# EAGLE board SparkFun_LiPo-Charger-Basic-MiniUSB-Panel-v10 (EAGLE 7.3.0), part 1 of 3
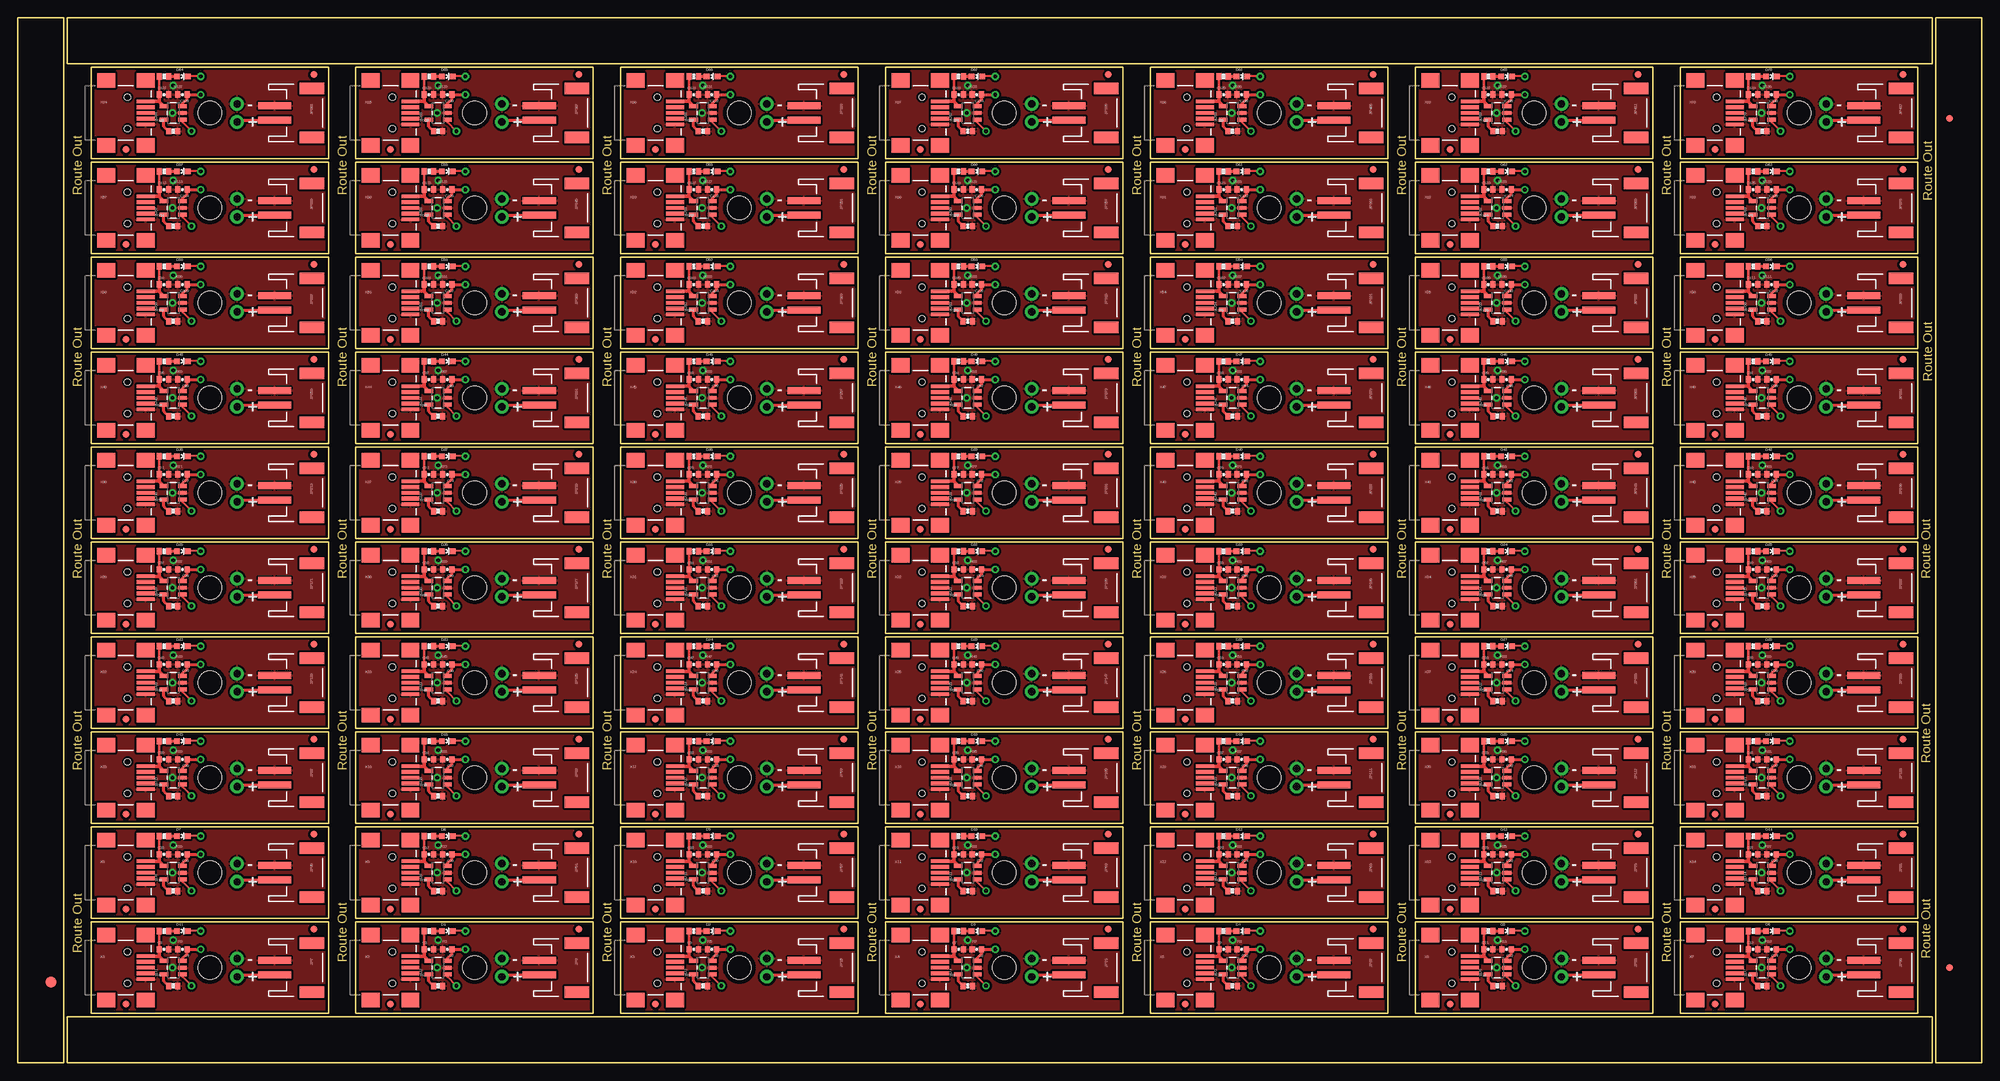
[diagram p0: board, top side]
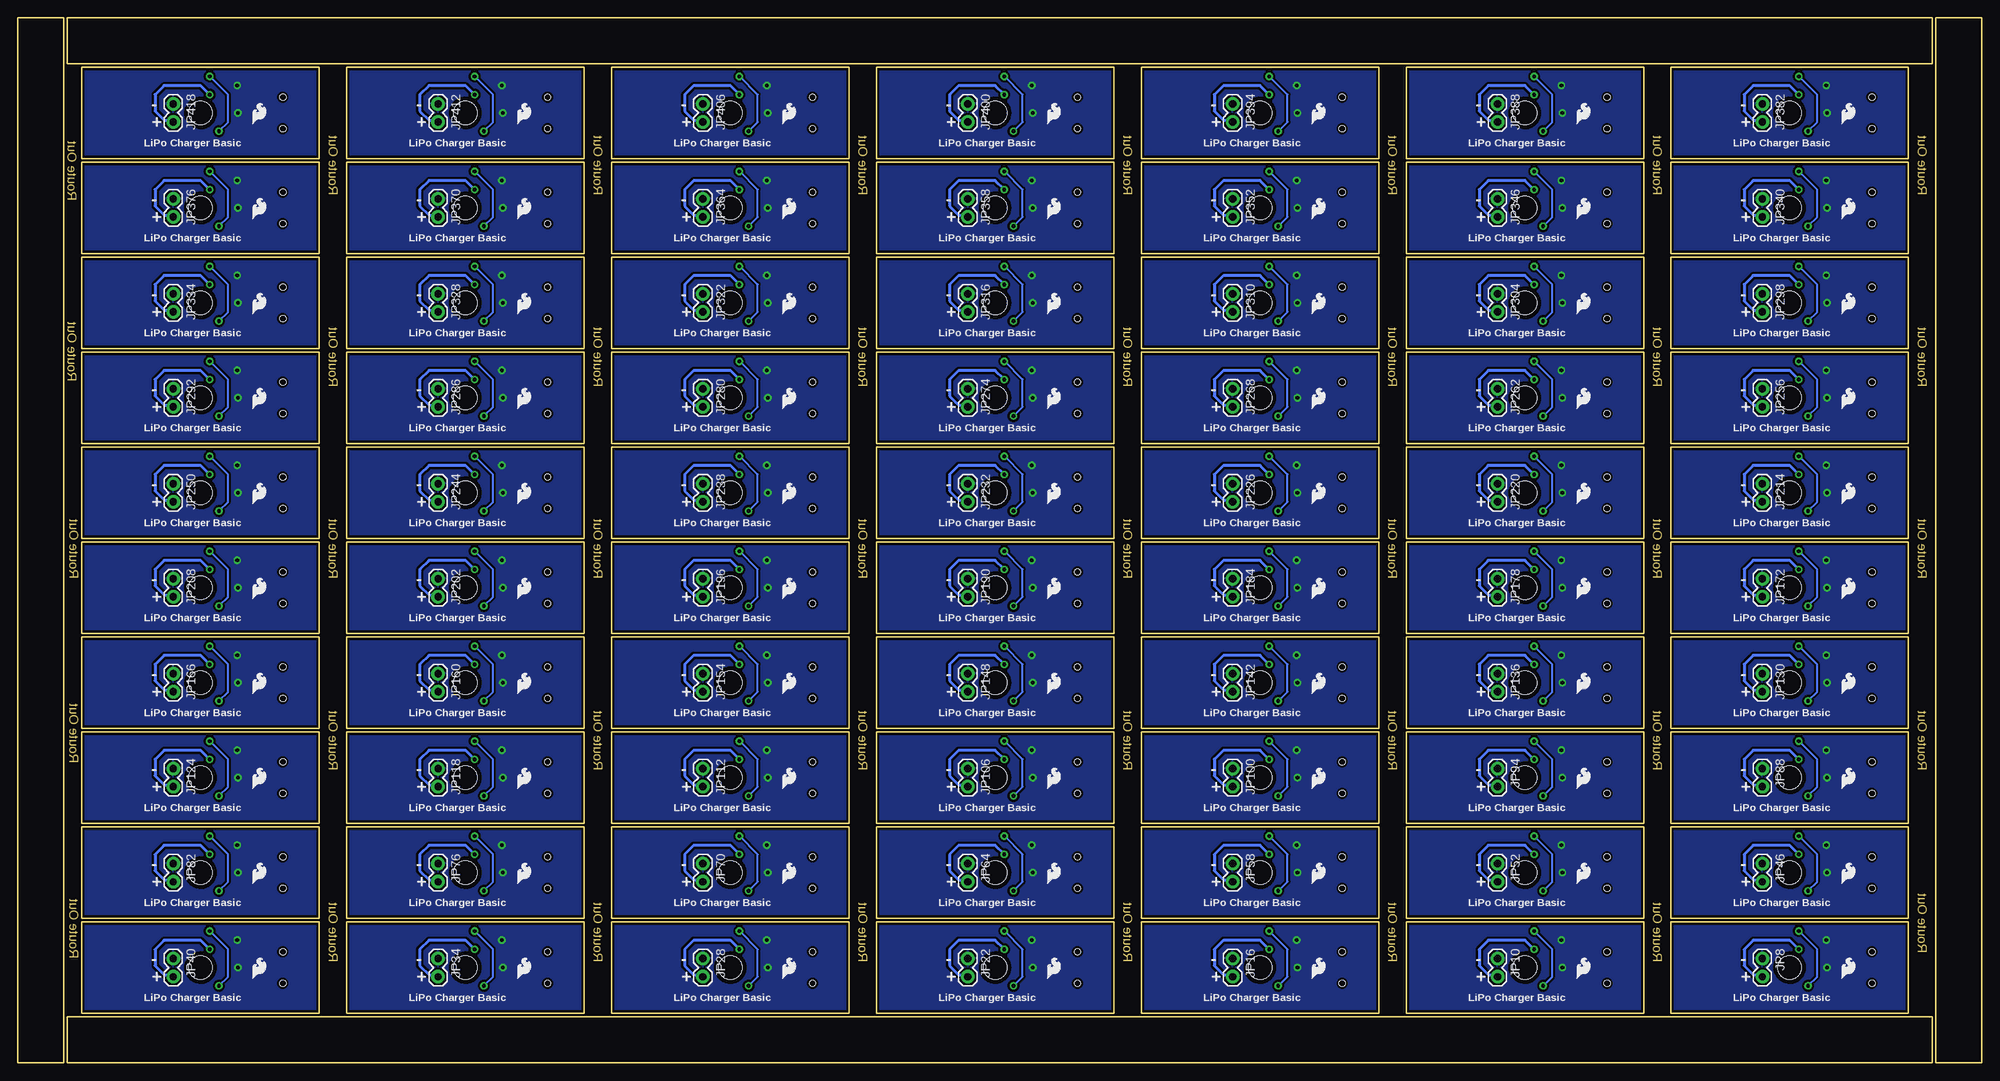
[diagram p1: board, bottom side, seen from below]

Size 273.05 x 145.29 mm. Coordinates in mm from the lower left corner, seen from the top.
Outline: 296 segments
Copper layers (1*16): Top 0.035mm / dielectric 1.5mm / Bottom 0.035mm
Design rules "SparkFun": minimum track width 8mil, minimum drill 20mil, track to track 8mil, track to pad 8mil, pad to pad 8mil, via to via 8mil, smd to smd 8mil, copper to edge 8mil, drill to drill 8mil, minimum pad ring 12mil, minimum via ring 10mil, stop-mask expansion 4mil, vias tented up to drill 20mil, thermal gap 10mil

## Footprints (pad centres in the part's own frame; a part is rotated, then mirrored left to right if it is on the bottom)
0402-CAP = smd 0.7 x 0.9: 1 -0.65,0; 2 0.65,0
LED-0603 = smd 0.8 x 0.8: A 0,-0.75; C 0,0.75
FIDUCIAL-1.5X3 = smd 1.5 x 1.5: 1 0,0
FIDUCIAL-1X2 = smd 1 x 1: 1 0,0
STAND-OFF = hole 3.302: 0,0
JST-2-SMD = smd 1 x 4.6: 1 -1,-3.7; 2 1,-3.7 | smd 1.6 x 3.4: NC1 -3.4,1.5; NC2 3.4,1.5
1X02 = drill 1.016 pad 1.88: 1 0,0; 2 2.54,0
0402-RES = smd 0.7 x 0.9: 1 -0.65,0; 2 0.65,0
SOT23-5 = smd 0.55 x 1.2: 1 -0.95,-1.3; 2 0,-1.3; 3 0.95,-1.3; 4 0.95,1.3; 5 -0.95,1.3
USB-MINIB = smd 2.5 x 0.5: D+ 2.5,0; D- 2.5,0.8; GND 2.5,-1.6; ID 2.5,-0.8; VBUS 2.5,1.6 | smd 2.5 x 2: MTN1 -3,4.5; MTN2 2.5,4.5; MTN3 -3,-4.5; MTN4 2.5,-4.5 | hole 0.9: 0,2.2; 0,-2.2

## Placement (x,y rotation side)
C1  4.7uF  [0402-CAP]  57.15,15.75 0 top
C2  4.7uF  [0402-CAP]  59.69,15.75 180 top
C3  4.7uF  [0402-CAP]  20.32,15.75 0 top
C4  4.7uF  [0402-CAP]  22.86,15.75 180 top
C5  4.7uF  [0402-CAP]  93.98,15.75 0 top
C6  4.7uF  [0402-CAP]  96.52,15.75 180 top
C7  4.7uF  [0402-CAP]  130.81,15.75 0 top
C8  4.7uF  [0402-CAP]  133.35,15.75 180 top
C9  4.7uF  [0402-CAP]  167.64,15.75 0 top
C10  4.7uF  [0402-CAP]  170.18,15.75 180 top
C11  4.7uF  [0402-CAP]  204.47,15.75 0 top
C12  4.7uF  [0402-CAP]  207.01,15.75 180 top
C13  4.7uF  [0402-CAP]  241.3,15.75 0 top
C14  4.7uF  [0402-CAP]  243.84,15.75 180 top
C15  4.7uF  [0402-CAP]  20.32,28.96 0 top
C16  4.7uF  [0402-CAP]  22.86,28.96 180 top
C17  4.7uF  [0402-CAP]  57.15,28.96 0 top
C18  4.7uF  [0402-CAP]  59.69,28.96 180 top
C19  4.7uF  [0402-CAP]  93.98,28.96 0 top
C20  4.7uF  [0402-CAP]  96.52,28.96 180 top
C21  4.7uF  [0402-CAP]  130.81,28.96 0 top
C22  4.7uF  [0402-CAP]  133.35,28.96 180 top
C23  4.7uF  [0402-CAP]  167.64,28.96 0 top
C24  4.7uF  [0402-CAP]  170.18,28.96 180 top
C25  4.7uF  [0402-CAP]  204.47,28.96 0 top
C26  4.7uF  [0402-CAP]  207.01,28.96 180 top
C27  4.7uF  [0402-CAP]  241.3,28.96 0 top
C28  4.7uF  [0402-CAP]  243.84,28.96 180 top
C29  4.7uF  [0402-CAP]  20.32,42.16 0 top
C30  4.7uF  [0402-CAP]  22.86,42.16 180 top
C31  4.7uF  [0402-CAP]  57.15,42.16 0 top
C32  4.7uF  [0402-CAP]  59.69,42.16 180 top
C33  4.7uF  [0402-CAP]  93.98,42.16 0 top
C34  4.7uF  [0402-CAP]  96.52,42.16 180 top
C35  4.7uF  [0402-CAP]  130.81,42.16 0 top
C36  4.7uF  [0402-CAP]  133.35,42.16 180 top
C37  4.7uF  [0402-CAP]  167.64,42.16 0 top
C38  4.7uF  [0402-CAP]  170.18,42.16 180 top
C39  4.7uF  [0402-CAP]  204.47,42.16 0 top
C40  4.7uF  [0402-CAP]  207.01,42.16 180 top
C41  4.7uF  [0402-CAP]  241.3,42.16 0 top
C42  4.7uF  [0402-CAP]  243.84,42.16 180 top
C43  4.7uF  [0402-CAP]  20.32,55.37 0 top
C44  4.7uF  [0402-CAP]  22.86,55.37 180 top
C45  4.7uF  [0402-CAP]  57.15,55.37 0 top
C46  4.7uF  [0402-CAP]  59.69,55.37 180 top
C47  4.7uF  [0402-CAP]  93.98,55.37 0 top
C48  4.7uF  [0402-CAP]  96.52,55.37 180 top
C49  4.7uF  [0402-CAP]  130.81,55.37 0 top
C50  4.7uF  [0402-CAP]  133.35,55.37 180 top
C51  4.7uF  [0402-CAP]  167.64,55.37 0 top
C52  4.7uF  [0402-CAP]  170.18,55.37 180 top
C53  4.7uF  [0402-CAP]  204.47,55.37 0 top
C54  4.7uF  [0402-CAP]  207.01,55.37 180 top
C55  4.7uF  [0402-CAP]  241.3,55.37 0 top
C56  4.7uF  [0402-CAP]  243.84,55.37 180 top
C57  4.7uF  [0402-CAP]  20.32,68.58 0 top
C58  4.7uF  [0402-CAP]  22.86,68.58 180 top
C59  4.7uF  [0402-CAP]  57.15,68.58 0 top
C60  4.7uF  [0402-CAP]  59.69,68.58 180 top
C61  4.7uF  [0402-CAP]  93.98,68.58 0 top
C62  4.7uF  [0402-CAP]  96.52,68.58 180 top
C63  4.7uF  [0402-CAP]  130.81,68.58 0 top
C64  4.7uF  [0402-CAP]  133.35,68.58 180 top
C65  4.7uF  [0402-CAP]  167.64,68.58 0 top
C66  4.7uF  [0402-CAP]  170.18,68.58 180 top
C67  4.7uF  [0402-CAP]  204.47,68.58 0 top
C68  4.7uF  [0402-CAP]  207.01,68.58 180 top
C69  4.7uF  [0402-CAP]  241.3,68.58 0 top
C70  4.7uF  [0402-CAP]  243.84,68.58 180 top
C71  4.7uF  [0402-CAP]  20.32,81.79 0 top
C72  4.7uF  [0402-CAP]  22.86,81.79 180 top
C73  4.7uF  [0402-CAP]  57.15,81.79 0 top
C74  4.7uF  [0402-CAP]  59.69,81.79 180 top
C75  4.7uF  [0402-CAP]  93.98,81.79 0 top
C76  4.7uF  [0402-CAP]  96.52,81.79 180 top
C77  4.7uF  [0402-CAP]  130.81,81.79 0 top
C78  4.7uF  [0402-CAP]  133.35,81.79 180 top
C79  4.7uF  [0402-CAP]  167.64,81.79 0 top
C80  4.7uF  [0402-CAP]  170.18,81.79 180 top
C81  4.7uF  [0402-CAP]  204.47,81.79 0 top
C82  4.7uF  [0402-CAP]  207.01,81.79 180 top
C83  4.7uF  [0402-CAP]  241.3,81.79 0 top
C84  4.7uF  [0402-CAP]  243.84,81.79 180 top
C85  4.7uF  [0402-CAP]  20.32,95 0 top
C86  4.7uF  [0402-CAP]  22.86,95 180 top
C87  4.7uF  [0402-CAP]  57.15,95 0 top
C88  4.7uF  [0402-CAP]  59.69,95 180 top
C89  4.7uF  [0402-CAP]  93.98,95 0 top
C90  4.7uF  [0402-CAP]  96.52,95 180 top
C91  4.7uF  [0402-CAP]  130.81,95 0 top
C92  4.7uF  [0402-CAP]  133.35,95 180 top
C93  4.7uF  [0402-CAP]  167.64,95 0 top
C94  4.7uF  [0402-CAP]  170.18,95 180 top
C95  4.7uF  [0402-CAP]  204.47,95 0 top
C96  4.7uF  [0402-CAP]  207.01,95 180 top
C97  4.7uF  [0402-CAP]  241.3,95 0 top
C98  4.7uF  [0402-CAP]  243.84,95 180 top
C99  4.7uF  [0402-CAP]  20.32,108.2 0 top
C100  4.7uF  [0402-CAP]  22.86,108.2 180 top
C101  4.7uF  [0402-CAP]  57.15,108.2 0 top
C102  4.7uF  [0402-CAP]  59.69,108.2 180 top
C103  4.7uF  [0402-CAP]  93.98,108.2 0 top
C104  4.7uF  [0402-CAP]  96.52,108.2 180 top
C105  4.7uF  [0402-CAP]  130.81,108.2 0 top
C106  4.7uF  [0402-CAP]  133.35,108.2 180 top
C107  4.7uF  [0402-CAP]  167.64,108.2 0 top
C108  4.7uF  [0402-CAP]  170.18,108.2 180 top
C109  4.7uF  [0402-CAP]  204.47,108.2 0 top
C110  4.7uF  [0402-CAP]  207.01,108.2 180 top
C111  4.7uF  [0402-CAP]  241.3,108.2 0 top
C112  4.7uF  [0402-CAP]  243.84,108.2 180 top
C113  4.7uF  [0402-CAP]  20.32,121.41 0 top
C114  4.7uF  [0402-CAP]  22.86,121.41 180 top
C115  4.7uF  [0402-CAP]  57.15,121.41 0 top
C116  4.7uF  [0402-CAP]  59.69,121.41 180 top
C117  4.7uF  [0402-CAP]  93.98,121.41 0 top
C118  4.7uF  [0402-CAP]  96.52,121.41 180 top
C119  4.7uF  [0402-CAP]  130.81,121.41 0 top
C120  4.7uF  [0402-CAP]  133.35,121.41 180 top
C121  4.7uF  [0402-CAP]  167.64,121.41 0 top
C122  4.7uF  [0402-CAP]  170.18,121.41 180 top
C123  4.7uF  [0402-CAP]  204.47,121.41 0 top
C124  4.7uF  [0402-CAP]  207.01,121.41 180 top
C125  4.7uF  [0402-CAP]  241.3,121.41 0 top
C126  4.7uF  [0402-CAP]  243.84,121.41 180 top
C127  4.7uF  [0402-CAP]  20.32,134.62 0 top
C128  4.7uF  [0402-CAP]  22.86,134.62 180 top
C129  4.7uF  [0402-CAP]  57.15,134.62 0 top
C130  4.7uF  [0402-CAP]  59.69,134.62 180 top
C131  4.7uF  [0402-CAP]  93.98,134.62 0 top
C132  4.7uF  [0402-CAP]  96.52,134.62 180 top
C133  4.7uF  [0402-CAP]  130.81,134.62 0 top
C134  4.7uF  [0402-CAP]  133.35,134.62 180 top
C135  4.7uF  [0402-CAP]  167.64,134.62 0 top
C136  4.7uF  [0402-CAP]  170.18,134.62 180 top
C137  4.7uF  [0402-CAP]  204.47,134.62 0 top
C138  4.7uF  [0402-CAP]  207.01,134.62 180 top
C139  4.7uF  [0402-CAP]  241.3,134.62 0 top
C140  4.7uF  [0402-CAP]  243.84,134.62 180 top
D1  RED  [LED-0603]  59.69,18.29 270 top
D2  RED  [LED-0603]  96.52,18.29 270 top
D3  RED  [LED-0603]  133.35,18.29 270 top
D4  RED  [LED-0603]  170.18,18.29 270 top
D5  RED  [LED-0603]  207.01,18.29 270 top
D6  RED  [LED-0603]  243.84,18.29 270 top
D7  RED  [LED-0603]  22.86,31.5 270 top
D8  RED  [LED-0603]  59.69,31.5 270 top
D9  RED  [LED-0603]  96.52,31.5 270 top
D10  RED  [LED-0603]  133.35,31.5 270 top
D11  RED  [LED-0603]  22.86,18.29 270 top
D12  RED  [LED-0603]  170.18,31.5 270 top
D13  RED  [LED-0603]  207.01,31.5 270 top
D14  RED  [LED-0603]  243.84,31.5 270 top
D15  RED  [LED-0603]  22.86,44.7 270 top
D16  RED  [LED-0603]  59.69,44.7 270 top
D17  RED  [LED-0603]  96.52,44.7 270 top
D18  RED  [LED-0603]  133.35,44.7 270 top
D19  RED  [LED-0603]  170.18,44.7 270 top
D20  RED  [LED-0603]  207.01,44.7 270 top
D21  RED  [LED-0603]  243.84,44.7 270 top
D22  RED  [LED-0603]  22.86,57.91 270 top
D23  RED  [LED-0603]  59.69,57.91 270 top
D24  RED  [LED-0603]  96.52,57.91 270 top
D25  RED  [LED-0603]  133.35,57.91 270 top
D26  RED  [LED-0603]  170.18,57.91 270 top
D27  RED  [LED-0603]  207.01,57.91 270 top
D28  RED  [LED-0603]  243.84,57.91 270 top
D29  RED  [LED-0603]  22.86,71.12 270 top
D30  RED  [LED-0603]  59.69,71.12 270 top
D31  RED  [LED-0603]  96.52,71.12 270 top
D32  RED  [LED-0603]  133.35,71.12 270 top
D33  RED  [LED-0603]  170.18,71.12 270 top
D34  RED  [LED-0603]  207.01,71.12 270 top
D35  RED  [LED-0603]  243.84,71.12 270 top
D36  RED  [LED-0603]  22.86,84.33 270 top
D37  RED  [LED-0603]  59.69,84.33 270 top
D38  RED  [LED-0603]  96.52,84.33 270 top
D39  RED  [LED-0603]  133.35,84.33 270 top
D40  RED  [LED-0603]  170.18,84.33 270 top
D41  RED  [LED-0603]  207.01,84.33 270 top
D42  RED  [LED-0603]  243.84,84.33 270 top
D43  RED  [LED-0603]  22.86,97.54 270 top
D44  RED  [LED-0603]  59.69,97.54 270 top
D45  RED  [LED-0603]  96.52,97.54 270 top
D46  RED  [LED-0603]  133.35,97.54 270 top
D47  RED  [LED-0603]  170.18,97.54 270 top
D48  RED  [LED-0603]  207.01,97.54 270 top
D49  RED  [LED-0603]  243.84,97.54 270 top
D50  RED  [LED-0603]  22.86,110.74 270 top
D51  RED  [LED-0603]  59.69,110.74 270 top
D52  RED  [LED-0603]  96.52,110.74 270 top
D53  RED  [LED-0603]  133.35,110.74 270 top
D54  RED  [LED-0603]  170.18,110.74 270 top
D55  RED  [LED-0603]  207.01,110.74 270 top
D56  RED  [LED-0603]  243.84,110.74 270 top
D57  RED  [LED-0603]  22.86,123.95 270 top
D58  RED  [LED-0603]  59.69,123.95 270 top
D59  RED  [LED-0603]  96.52,123.95 270 top
D60  RED  [LED-0603]  133.35,123.95 270 top
D61  RED  [LED-0603]  170.18,123.95 270 top
D62  RED  [LED-0603]  207.01,123.95 270 top
D63  RED  [LED-0603]  243.84,123.95 270 top
D64  RED  [LED-0603]  22.86,137.16 270 top
D65  RED  [LED-0603]  59.69,137.16 270 top
D66  RED  [LED-0603]  96.52,137.16 270 top
D67  RED  [LED-0603]  133.35,137.16 270 top
D68  RED  [LED-0603]  170.18,137.16 270 top
D69  RED  [LED-0603]  207.01,137.16 270 top
D70  RED  [LED-0603]  243.84,137.16 270 top
E$1  [FIDUCIAL-1.5X3]  4.57,11.18 0 top
E$4  [FIDUCIAL-1X2]  268.61,13.21 0 top
E$5  [FIDUCIAL-1X2]  268.61,131.32 180 top
JP1  LOGO-SFESK  [SFE-LOGO-FLAME]  19.43,11.68 0 bottom
JP2  STAND-OFF  [STAND-OFF]  26.67,13.21 0 top
JP3  FIDUCIAL1X2  [FIDUCIAL-1X2]  14.99,8.13 0 top
JP4  FIDUCIAL1X2  [FIDUCIAL-1X2]  41.15,18.54 0 top
JP5  LOGO-SFESK  [SFE-LOGO-FLAME]  56.26,11.68 0 bottom
JP6  STAND-OFF  [STAND-OFF]  63.5,13.21 0 top
JP7  LiPo Battery  [JST-2-SMD]  39.37,13.21 270 top
JP8  [1X02]  30.48,14.48 270 bottom
JP9  LiPo Battery  [JST-2-SMD]  76.2,13.21 270 top
JP10  [1X02]  67.31,14.48 270 bottom
JP11  FIDUCIAL1X2  [FIDUCIAL-1X2]  51.82,8.13 0 top
JP12  FIDUCIAL1X2  [FIDUCIAL-1X2]  77.98,18.54 0 top
JP13  LOGO-SFESK  [SFE-LOGO-FLAME]  93.09,11.68 0 bottom
JP14  STAND-OFF  [STAND-OFF]  100.33,13.21 0 top
JP15  LiPo Battery  [JST-2-SMD]  113.03,13.21 270 top
JP16  [1X02]  104.14,14.48 270 bottom
JP17  FIDUCIAL1X2  [FIDUCIAL-1X2]  88.65,8.13 0 top
JP18  FIDUCIAL1X2  [FIDUCIAL-1X2]  114.81,18.54 0 top
JP19  LOGO-SFESK  [SFE-LOGO-FLAME]  129.92,11.68 0 bottom
JP20  STAND-OFF  [STAND-OFF]  137.16,13.21 0 top
JP21  LiPo Battery  [JST-2-SMD]  149.86,13.21 270 top
JP22  [1X02]  140.97,14.48 270 bottom
JP23  FIDUCIAL1X2  [FIDUCIAL-1X2]  125.48,8.13 0 top
JP24  FIDUCIAL1X2  [FIDUCIAL-1X2]  151.64,18.54 0 top
JP25  LOGO-SFESK  [SFE-LOGO-FLAME]  166.75,11.68 0 bottom
JP26  STAND-OFF  [STAND-OFF]  173.99,13.21 0 top
JP27  LiPo Battery  [JST-2-SMD]  186.69,13.21 270 top
JP28  [1X02]  177.8,14.48 270 bottom
JP29  FIDUCIAL1X2  [FIDUCIAL-1X2]  162.31,8.13 0 top
JP30  FIDUCIAL1X2  [FIDUCIAL-1X2]  188.47,18.54 0 top
JP31  LOGO-SFESK  [SFE-LOGO-FLAME]  203.58,11.68 0 bottom
JP32  STAND-OFF  [STAND-OFF]  210.82,13.21 0 top
JP33  LiPo Battery  [JST-2-SMD]  223.52,13.21 270 top
JP34  [1X02]  214.63,14.48 270 bottom
JP35  FIDUCIAL1X2  [FIDUCIAL-1X2]  199.14,8.13 0 top
JP36  FIDUCIAL1X2  [FIDUCIAL-1X2]  225.3,18.54 0 top
JP37  LOGO-SFESK  [SFE-LOGO-FLAME]  240.41,11.68 0 bottom
JP38  STAND-OFF  [STAND-OFF]  247.65,13.21 0 top
JP39  LiPo Battery  [JST-2-SMD]  260.35,13.21 270 top
JP40  [1X02]  251.46,14.48 270 bottom
JP41  FIDUCIAL1X2  [FIDUCIAL-1X2]  235.97,8.13 0 top
JP42  FIDUCIAL1X2  [FIDUCIAL-1X2]  262.13,18.54 0 top
JP43  LOGO-SFESK  [SFE-LOGO-FLAME]  19.43,24.89 0 bottom
JP44  STAND-OFF  [STAND-OFF]  26.67,26.42 0 top
JP45  LiPo Battery  [JST-2-SMD]  39.37,26.42 270 top
JP46  [1X02]  30.48,27.69 270 bottom
JP47  FIDUCIAL1X2  [FIDUCIAL-1X2]  14.99,21.34 0 top
JP48  FIDUCIAL1X2  [FIDUCIAL-1X2]  41.15,31.75 0 top
JP49  LOGO-SFESK  [SFE-LOGO-FLAME]  56.26,24.89 0 bottom
JP50  STAND-OFF  [STAND-OFF]  63.5,26.42 0 top
JP51  LiPo Battery  [JST-2-SMD]  76.2,26.42 270 top
JP52  [1X02]  67.31,27.69 270 bottom
JP53  FIDUCIAL1X2  [FIDUCIAL-1X2]  51.82,21.34 0 top
JP54  FIDUCIAL1X2  [FIDUCIAL-1X2]  77.98,31.75 0 top
JP55  LOGO-SFESK  [SFE-LOGO-FLAME]  93.09,24.89 0 bottom
JP56  STAND-OFF  [STAND-OFF]  100.33,26.42 0 top
JP57  LiPo Battery  [JST-2-SMD]  113.03,26.42 270 top
JP58  [1X02]  104.14,27.69 270 bottom
JP59  FIDUCIAL1X2  [FIDUCIAL-1X2]  88.65,21.34 0 top
JP60  FIDUCIAL1X2  [FIDUCIAL-1X2]  114.81,31.75 0 top
JP61  LOGO-SFESK  [SFE-LOGO-FLAME]  129.92,24.89 0 bottom
JP62  STAND-OFF  [STAND-OFF]  137.16,26.42 0 top
JP63  LiPo Battery  [JST-2-SMD]  149.86,26.42 270 top
JP64  [1X02]  140.97,27.69 270 bottom
JP65  FIDUCIAL1X2  [FIDUCIAL-1X2]  125.48,21.34 0 top
JP66  FIDUCIAL1X2  [FIDUCIAL-1X2]  151.64,31.75 0 top
JP67  LOGO-SFESK  [SFE-LOGO-FLAME]  166.75,24.89 0 bottom
JP68  STAND-OFF  [STAND-OFF]  173.99,26.42 0 top
JP69  LiPo Battery  [JST-2-SMD]  186.69,26.42 270 top
JP70  [1X02]  177.8,27.69 270 bottom
JP71  FIDUCIAL1X2  [FIDUCIAL-1X2]  162.31,21.34 0 top
JP72  FIDUCIAL1X2  [FIDUCIAL-1X2]  188.47,31.75 0 top
JP73  LOGO-SFESK  [SFE-LOGO-FLAME]  203.58,24.89 0 bottom
JP74  STAND-OFF  [STAND-OFF]  210.82,26.42 0 top
JP75  LiPo Battery  [JST-2-SMD]  223.52,26.42 270 top
JP76  [1X02]  214.63,27.69 270 bottom
JP77  FIDUCIAL1X2  [FIDUCIAL-1X2]  199.14,21.34 0 top
JP78  FIDUCIAL1X2  [FIDUCIAL-1X2]  225.3,31.75 0 top
JP79  LOGO-SFESK  [SFE-LOGO-FLAME]  240.41,24.89 0 bottom
JP80  STAND-OFF  [STAND-OFF]  247.65,26.42 0 top
JP81  LiPo Battery  [JST-2-SMD]  260.35,26.42 270 top
JP82  [1X02]  251.46,27.69 270 bottom
JP83  FIDUCIAL1X2  [FIDUCIAL-1X2]  235.97,21.34 0 top
JP84  FIDUCIAL1X2  [FIDUCIAL-1X2]  262.13,31.75 0 top
JP85  LOGO-SFESK  [SFE-LOGO-FLAME]  19.43,38.1 0 bottom
JP86  STAND-OFF  [STAND-OFF]  26.67,39.62 0 top
JP87  LiPo Battery  [JST-2-SMD]  39.37,39.62 270 top
JP88  [1X02]  30.48,40.89 270 bottom
JP89  FIDUCIAL1X2  [FIDUCIAL-1X2]  14.99,34.54 0 top
JP90  FIDUCIAL1X2  [FIDUCIAL-1X2]  41.15,44.96 0 top
JP91  LOGO-SFESK  [SFE-LOGO-FLAME]  56.26,38.1 0 bottom
JP92  STAND-OFF  [STAND-OFF]  63.5,39.62 0 top
JP93  LiPo Battery  [JST-2-SMD]  76.2,39.62 270 top
JP94  [1X02]  67.31,40.89 270 bottom
JP95  FIDUCIAL1X2  [FIDUCIAL-1X2]  51.82,34.54 0 top
JP96  FIDUCIAL1X2  [FIDUCIAL-1X2]  77.98,44.96 0 top
JP97  LOGO-SFESK  [SFE-LOGO-FLAME]  93.09,38.1 0 bottom
JP98  STAND-OFF  [STAND-OFF]  100.33,39.62 0 top
JP99  LiPo Battery  [JST-2-SMD]  113.03,39.62 270 top
JP100  [1X02]  104.14,40.89 270 bottom
JP101  FIDUCIAL1X2  [FIDUCIAL-1X2]  88.65,34.54 0 top
JP102  FIDUCIAL1X2  [FIDUCIAL-1X2]  114.81,44.96 0 top
JP103  LOGO-SFESK  [SFE-LOGO-FLAME]  129.92,38.1 0 bottom
JP104  STAND-OFF  [STAND-OFF]  137.16,39.62 0 top
JP105  LiPo Battery  [JST-2-SMD]  149.86,39.62 270 top
JP106  [1X02]  140.97,40.89 270 bottom
JP107  FIDUCIAL1X2  [FIDUCIAL-1X2]  125.48,34.54 0 top
JP108  FIDUCIAL1X2  [FIDUCIAL-1X2]  151.64,44.96 0 top
JP109  LOGO-SFESK  [SFE-LOGO-FLAME]  166.75,38.1 0 bottom
JP110  STAND-OFF  [STAND-OFF]  173.99,39.62 0 top
JP111  LiPo Battery  [JST-2-SMD]  186.69,39.62 270 top
JP112  [1X02]  177.8,40.89 270 bottom
JP113  FIDUCIAL1X2  [FIDUCIAL-1X2]  162.31,34.54 0 top
JP114  FIDUCIAL1X2  [FIDUCIAL-1X2]  188.47,44.96 0 top
JP115  LOGO-SFESK  [SFE-LOGO-FLAME]  203.58,38.1 0 bottom
JP116  STAND-OFF  [STAND-OFF]  210.82,39.62 0 top
JP117  LiPo Battery  [JST-2-SMD]  223.52,39.62 270 top
JP118  [1X02]  214.63,40.89 270 bottom
JP119  FIDUCIAL1X2  [FIDUCIAL-1X2]  199.14,34.54 0 top
JP120  FIDUCIAL1X2  [FIDUCIAL-1X2]  225.3,44.96 0 top
JP121  LOGO-SFESK  [SFE-LOGO-FLAME]  240.41,38.1 0 bottom
JP122  STAND-OFF  [STAND-OFF]  247.65,39.62 0 top
JP123  LiPo Battery  [JST-2-SMD]  260.35,39.62 270 top
JP124  [1X02]  251.46,40.89 270 bottom
JP125  FIDUCIAL1X2  [FIDUCIAL-1X2]  235.97,34.54 0 top
JP126  FIDUCIAL1X2  [FIDUCIAL-1X2]  262.13,44.96 0 top
JP127  LOGO-SFESK  [SFE-LOGO-FLAME]  19.43,51.31 0 bottom
JP128  STAND-OFF  [STAND-OFF]  26.67,52.83 0 top
JP129  LiPo Battery  [JST-2-SMD]  39.37,52.83 270 top
JP130  [1X02]  30.48,54.1 270 bottom
JP131  FIDUCIAL1X2  [FIDUCIAL-1X2]  14.99,47.75 0 top
JP132  FIDUCIAL1X2  [FIDUCIAL-1X2]  41.15,58.17 0 top
JP133  LOGO-SFESK  [SFE-LOGO-FLAME]  56.26,51.31 0 bottom
JP134  STAND-OFF  [STAND-OFF]  63.5,52.83 0 top
JP135  LiPo Battery  [JST-2-SMD]  76.2,52.83 270 top
JP136  [1X02]  67.31,54.1 270 bottom
JP137  FIDUCIAL1X2  [FIDUCIAL-1X2]  51.82,47.75 0 top
JP138  FIDUCIAL1X2  [FIDUCIAL-1X2]  77.98,58.17 0 top
JP139  LOGO-SFESK  [SFE-LOGO-FLAME]  93.09,51.31 0 bottom
JP140  STAND-OFF  [STAND-OFF]  100.33,52.83 0 top
JP141  LiPo Battery  [JST-2-SMD]  113.03,52.83 270 top
JP142  [1X02]  104.14,54.1 270 bottom
JP143  FIDUCIAL1X2  [FIDUCIAL-1X2]  88.65,47.75 0 top
JP144  FIDUCIAL1X2  [FIDUCIAL-1X2]  114.81,58.17 0 top
JP145  LOGO-SFESK  [SFE-LOGO-FLAME]  129.92,51.31 0 bottom
JP146  STAND-OFF  [STAND-OFF]  137.16,52.83 0 top
JP147  LiPo Battery  [JST-2-SMD]  149.86,52.83 270 top
JP148  [1X02]  140.97,54.1 270 bottom
JP149  FIDUCIAL1X2  [FIDUCIAL-1X2]  125.48,47.75 0 top
JP150  FIDUCIAL1X2  [FIDUCIAL-1X2]  151.64,58.17 0 top
JP151  LOGO-SFESK  [SFE-LOGO-FLAME]  166.75,51.31 0 bottom
JP152  STAND-OFF  [STAND-OFF]  173.99,52.83 0 top
JP153  LiPo Battery  [JST-2-SMD]  186.69,52.83 270 top
JP154  [1X02]  177.8,54.1 270 bottom
JP155  FIDUCIAL1X2  [FIDUCIAL-1X2]  162.31,47.75 0 top
JP156  FIDUCIAL1X2  [FIDUCIAL-1X2]  188.47,58.17 0 top
JP157  LOGO-SFESK  [SFE-LOGO-FLAME]  203.58,51.31 0 bottom
JP158  STAND-OFF  [STAND-OFF]  210.82,52.83 0 top
JP159  LiPo Battery  [JST-2-SMD]  223.52,52.83 270 top
JP160  [1X02]  214.63,54.1 270 bottom
JP161  FIDUCIAL1X2  [FIDUCIAL-1X2]  199.14,47.75 0 top
JP162  FIDUCIAL1X2  [FIDUCIAL-1X2]  225.3,58.17 0 top
JP163  LOGO-SFESK  [SFE-LOGO-FLAME]  240.41,51.31 0 bottom
JP164  STAND-OFF  [STAND-OFF]  247.65,52.83 0 top
JP165  LiPo Battery  [JST-2-SMD]  260.35,52.83 270 top
JP166  [1X02]  251.46,54.1 270 bottom
JP167  FIDUCIAL1X2  [FIDUCIAL-1X2]  235.97,47.75 0 top
JP168  FIDUCIAL1X2  [FIDUCIAL-1X2]  262.13,58.17 0 top
JP169  LOGO-SFESK  [SFE-LOGO-FLAME]  19.43,64.52 0 bottom
JP170  STAND-OFF  [STAND-OFF]  26.67,66.04 0 top
JP171  LiPo Battery  [JST-2-SMD]  39.37,66.04 270 top
JP172  [1X02]  30.48,67.31 270 bottom
JP173  FIDUCIAL1X2  [FIDUCIAL-1X2]  14.99,60.96 0 top
JP174  FIDUCIAL1X2  [FIDUCIAL-1X2]  41.15,71.37 0 top
JP175  LOGO-SFESK  [SFE-LOGO-FLAME]  56.26,64.52 0 bottom
JP176  STAND-OFF  [STAND-OFF]  63.5,66.04 0 top
JP177  LiPo Battery  [JST-2-SMD]  76.2,66.04 270 top
JP178  [1X02]  67.31,67.31 270 bottom
JP179  FIDUCIAL1X2  [FIDUCIAL-1X2]  51.82,60.96 0 top
JP180  FIDUCIAL1X2  [FIDUCIAL-1X2]  77.98,71.37 0 top
JP181  LOGO-SFESK  [SFE-LOGO-FLAME]  93.09,64.52 0 bottom
JP182  STAND-OFF  [STAND-OFF]  100.33,66.04 0 top
JP183  LiPo Battery  [JST-2-SMD]  113.03,66.04 270 top
JP184  [1X02]  104.14,67.31 270 bottom
JP185  FIDUCIAL1X2  [FIDUCIAL-1X2]  88.65,60.96 0 top
JP186  FIDUCIAL1X2  [FIDUCIAL-1X2]  114.81,71.37 0 top
JP187  LOGO-SFESK  [SFE-LOGO-FLAME]  129.92,64.52 0 bottom
JP188  STAND-OFF  [STAND-OFF]  137.16,66.04 0 top
JP189  LiPo Battery  [JST-2-SMD]  149.86,66.04 270 top
JP190  [1X02]  140.97,67.31 270 bottom
JP191  FIDUCIAL1X2  [FIDUCIAL-1X2]  125.48,60.96 0 top
JP192  FIDUCIAL1X2  [FIDUCIAL-1X2]  151.64,71.37 0 top
JP193  LOGO-SFESK  [SFE-LOGO-FLAME]  166.75,64.52 0 bottom
JP194  STAND-OFF  [STAND-OFF]  173.99,66.04 0 top
JP195  LiPo Battery  [JST-2-SMD]  186.69,66.04 270 top
JP196  [1X02]  177.8,67.31 270 bottom
JP197  FIDUCIAL1X2  [FIDUCIAL-1X2]  162.31,60.96 0 top
JP198  FIDUCIAL1X2  [FIDUCIAL-1X2]  188.47,71.37 0 top
JP199  LOGO-SFESK  [SFE-LOGO-FLAME]  203.58,64.52 0 bottom
JP200  STAND-OFF  [STAND-OFF]  210.82,66.04 0 top
JP201  LiPo Battery  [JST-2-SMD]  223.52,66.04 270 top
JP202  [1X02]  214.63,67.31 270 bottom
JP203  FIDUCIAL1X2  [FIDUCIAL-1X2]  199.14,60.96 0 top
JP204  FIDUCIAL1X2  [FIDUCIAL-1X2]  225.3,71.37 0 top
JP205  LOGO-SFESK  [SFE-LOGO-FLAME]  240.41,64.52 0 bottom
JP206  STAND-OFF  [STAND-OFF]  247.65,66.04 0 top
JP207  LiPo Battery  [JST-2-SMD]  260.35,66.04 270 top
JP208  [1X02]  251.46,67.31 270 bottom
JP209  FIDUCIAL1X2  [FIDUCIAL-1X2]  235.97,60.96 0 top
JP210  FIDUCIAL1X2  [FIDUCIAL-1X2]  262.13,71.37 0 top
JP211  LOGO-SFESK  [SFE-LOGO-FLAME]  19.43,77.72 0 bottom
JP212  STAND-OFF  [STAND-OFF]  26.67,79.25 0 top
JP213  LiPo Battery  [JST-2-SMD]  39.37,79.25 270 top
JP214  [1X02]  30.48,80.52 270 bottom
JP215  FIDUCIAL1X2  [FIDUCIAL-1X2]  14.99,74.17 0 top
JP216  FIDUCIAL1X2  [FIDUCIAL-1X2]  41.15,84.58 0 top
JP217  LOGO-SFESK  [SFE-LOGO-FLAME]  56.26,77.72 0 bottom
JP218  STAND-OFF  [STAND-OFF]  63.5,79.25 0 top
JP219  LiPo Battery  [JST-2-SMD]  76.2,79.25 270 top
JP220  [1X02]  67.31,80.52 270 bottom
JP221  FIDUCIAL1X2  [FIDUCIAL-1X2]  51.82,74.17 0 top
JP222  FIDUCIAL1X2  [FIDUCIAL-1X2]  77.98,84.58 0 top
JP223  LOGO-SFESK  [SFE-LOGO-FLAME]  93.09,77.72 0 bottom
JP224  STAND-OFF  [STAND-OFF]  100.33,79.25 0 top
JP225  LiPo Battery  [JST-2-SMD]  113.03,79.25 270 top
JP226  [1X02]  104.14,80.52 270 bottom
JP227  FIDUCIAL1X2  [FIDUCIAL-1X2]  88.65,74.17 0 top
JP228  FIDUCIAL1X2  [FIDUCIAL-1X2]  114.81,84.58 0 top
JP229  LOGO-SFESK  [SFE-LOGO-FLAME]  129.92,77.72 0 bottom
JP230  STAND-OFF  [STAND-OFF]  137.16,79.25 0 top
JP231  LiPo Battery  [JST-2-SMD]  149.86,79.25 270 top
JP232  [1X02]  140.97,80.52 270 bottom
JP233  FIDUCIAL1X2  [FIDUCIAL-1X2]  125.48,74.17 0 top
JP234  FIDUCIAL1X2  [FIDUCIAL-1X2]  151.64,84.58 0 top
JP235  LOGO-SFESK  [SFE-LOGO-FLAME]  166.75,77.72 0 bottom
JP236  STAND-OFF  [STAND-OFF]  173.99,79.25 0 top
JP237  LiPo Battery  [JST-2-SMD]  186.69,79.25 270 top
JP238  [1X02]  177.8,80.52 270 bottom
JP239  FIDUCIAL1X2  [FIDUCIAL-1X2]  162.31,74.17 0 top
JP240  FIDUCIAL1X2  [FIDUCIAL-1X2]  188.47,84.58 0 top
JP241  LOGO-SFESK  [SFE-LOGO-FLAME]  203.58,77.72 0 bottom
JP242  STAND-OFF  [STAND-OFF]  210.82,79.25 0 top
JP243  LiPo Battery  [JST-2-SMD]  223.52,79.25 270 top
JP244  [1X02]  214.63,80.52 270 bottom
JP245  FIDUCIAL1X2  [FIDUCIAL-1X2]  199.14,74.17 0 top
JP246  FIDUCIAL1X2  [FIDUCIAL-1X2]  225.3,84.58 0 top
JP247  LOGO-SFESK  [SFE-LOGO-FLAME]  240.41,77.72 0 bottom
JP248  STAND-OFF  [STAND-OFF]  247.65,79.25 0 top
JP249  LiPo Battery  [JST-2-SMD]  260.35,79.25 270 top
JP250  [1X02]  251.46,80.52 270 bottom
JP251  FIDUCIAL1X2  [FIDUCIAL-1X2]  235.97,74.17 0 top
JP252  FIDUCIAL1X2  [FIDUCIAL-1X2]  262.13,84.58 0 top
JP253  LOGO-SFESK  [SFE-LOGO-FLAME]  19.43,90.93 0 bottom
JP254  STAND-OFF  [STAND-OFF]  26.67,92.46 0 top
JP255  LiPo Battery  [JST-2-SMD]  39.37,92.46 270 top
JP256  [1X02]  30.48,93.73 270 bottom
JP257  FIDUCIAL1X2  [FIDUCIAL-1X2]  14.99,87.38 0 top
JP258  FIDUCIAL1X2  [FIDUCIAL-1X2]  41.15,97.79 0 top
JP259  LOGO-SFESK  [SFE-LOGO-FLAME]  56.26,90.93 0 bottom
JP260  STAND-OFF  [STAND-OFF]  63.5,92.46 0 top
JP261  LiPo Battery  [JST-2-SMD]  76.2,92.46 270 top
JP262  [1X02]  67.31,93.73 270 bottom
JP263  FIDUCIAL1X2  [FIDUCIAL-1X2]  51.82,87.38 0 top
JP264  FIDUCIAL1X2  [FIDUCIAL-1X2]  77.98,97.79 0 top
JP265  LOGO-SFESK  [SFE-LOGO-FLAME]  93.09,90.93 0 bottom
JP266  STAND-OFF  [STAND-OFF]  100.33,92.46 0 top
JP267  LiPo Battery  [JST-2-SMD]  113.03,92.46 270 top
JP268  [1X02]  104.14,93.73 270 bottom
JP269  FIDUCIAL1X2  [FIDUCIAL-1X2]  88.65,87.38 0 top
JP270  FIDUCIAL1X2  [FIDUCIAL-1X2]  114.81,97.79 0 top
JP271  LOGO-SFESK  [SFE-LOGO-FLAME]  129.92,90.93 0 bottom
JP272  STAND-OFF  [STAND-OFF]  137.16,92.46 0 top
JP273  LiPo Battery  [JST-2-SMD]  149.86,92.46 270 top
JP274  [1X02]  140.97,93.73 270 bottom
JP275  FIDUCIAL1X2  [FIDUCIAL-1X2]  125.48,87.38 0 top
JP276  FIDUCIAL1X2  [FIDUCIAL-1X2]  151.64,97.79 0 top
JP277  LOGO-SFESK  [SFE-LOGO-FLAME]  166.75,90.93 0 bottom
JP278  STAND-OFF  [STAND-OFF]  173.99,92.46 0 top
JP279  LiPo Battery  [JST-2-SMD]  186.69,92.46 270 top
JP280  [1X02]  177.8,93.73 270 bottom
JP281  FIDUCIAL1X2  [FIDUCIAL-1X2]  162.31,87.38 0 top
JP282  FIDUCIAL1X2  [FIDUCIAL-1X2]  188.47,97.79 0 top
JP283  LOGO-SFESK  [SFE-LOGO-FLAME]  203.58,90.93 0 bottom
JP284  STAND-OFF  [STAND-OFF]  210.82,92.46 0 top
JP285  LiPo Battery  [JST-2-SMD]  223.52,92.46 270 top
JP286  [1X02]  214.63,93.73 270 bottom
JP287  FIDUCIAL1X2  [FIDUCIAL-1X2]  199.14,87.38 0 top
JP288  FIDUCIAL1X2  [FIDUCIAL-1X2]  225.3,97.79 0 top
JP289  LOGO-SFESK  [SFE-LOGO-FLAME]  240.41,90.93 0 bottom
JP290  STAND-OFF  [STAND-OFF]  247.65,92.46 0 top
JP291  LiPo Battery  [JST-2-SMD]  260.35,92.46 270 top
JP292  [1X02]  251.46,93.73 270 bottom
JP293  FIDUCIAL1X2  [FIDUCIAL-1X2]  235.97,87.38 0 top
JP294  FIDUCIAL1X2  [FIDUCIAL-1X2]  262.13,97.79 0 top
JP295  LOGO-SFESK  [SFE-LOGO-FLAME]  19.43,104.14 0 bottom
JP296  STAND-OFF  [STAND-OFF]  26.67,105.66 0 top
JP297  LiPo Battery  [JST-2-SMD]  39.37,105.66 270 top
JP298  [1X02]  30.48,106.93 270 bottom
JP299  FIDUCIAL1X2  [FIDUCIAL-1X2]  14.99,100.58 0 top
JP300  FIDUCIAL1X2  [FIDUCIAL-1X2]  41.15,111 0 top
JP301  LOGO-SFESK  [SFE-LOGO-FLAME]  56.26,104.14 0 bottom
JP302  STAND-OFF  [STAND-OFF]  63.5,105.66 0 top
JP303  LiPo Battery  [JST-2-SMD]  76.2,105.66 270 top
JP304  [1X02]  67.31,106.93 270 bottom
JP305  FIDUCIAL1X2  [FIDUCIAL-1X2]  51.82,100.58 0 top
JP306  FIDUCIAL1X2  [FIDUCIAL-1X2]  77.98,111 0 top
JP307  LOGO-SFESK  [SFE-LOGO-FLAME]  93.09,104.14 0 bottom
JP308  STAND-OFF  [STAND-OFF]  100.33,105.66 0 top
JP309  LiPo Battery  [JST-2-SMD]  113.03,105.66 270 top
JP310  [1X02]  104.14,106.93 270 bottom
JP311  FIDUCIAL1X2  [FIDUCIAL-1X2]  88.65,100.58 0 top
JP312  FIDUCIAL1X2  [FIDUCIAL-1X2]  114.81,111 0 top
JP313  LOGO-SFESK  [SFE-LOGO-FLAME]  129.92,104.14 0 bottom
JP314  STAND-OFF  [STAND-OFF]  137.16,105.66 0 top
JP315  LiPo Battery  [JST-2-SMD]  149.86,105.66 270 top
JP316  [1X02]  140.97,106.93 270 bottom
JP317  FIDUCIAL1X2  [FIDUCIAL-1X2]  125.48,100.58 0 top
JP318  FIDUCIAL1X2  [FIDUCIAL-1X2]  151.64,111 0 top
JP319  LOGO-SFESK  [SFE-LOGO-FLAME]  166.75,104.14 0 bottom
JP320  STAND-OFF  [STAND-OFF]  173.99,105.66 0 top
JP321  LiPo Battery  [JST-2-SMD]  186.69,105.66 270 top
JP322  [1X02]  177.8,106.93 270 bottom
JP323  FIDUCIAL1X2  [FIDUCIAL-1X2]  162.31,100.58 0 top
JP324  FIDUCIAL1X2  [FIDUCIAL-1X2]  188.47,111 0 top
JP325  LOGO-SFESK  [SFE-LOGO-FLAME]  203.58,104.14 0 bottom
JP326  STAND-OFF  [STAND-OFF]  210.82,105.66 0 top
JP327  LiPo Battery  [JST-2-SMD]  223.52,105.66 270 top
JP328  [1X02]  214.63,106.93 270 bottom
JP329  FIDUCIAL1X2  [FIDUCIAL-1X2]  199.14,100.58 0 top
JP330  FIDUCIAL1X2  [FIDUCIAL-1X2]  225.3,111 0 top
JP331  LOGO-SFESK  [SFE-LOGO-FLAME]  240.41,104.14 0 bottom
JP332  STAND-OFF  [STAND-OFF]  247.65,105.66 0 top
JP333  LiPo Battery  [JST-2-SMD]  260.35,105.66 270 top
JP334  [1X02]  251.46,106.93 270 bottom
JP335  FIDUCIAL1X2  [FIDUCIAL-1X2]  235.97,100.58 0 top
JP336  FIDUCIAL1X2  [FIDUCIAL-1X2]  262.13,111 0 top
JP337  LOGO-SFESK  [SFE-LOGO-FLAME]  19.43,117.35 0 bottom
JP338  STAND-OFF  [STAND-OFF]  26.67,118.87 0 top
JP339  LiPo Battery  [JST-2-SMD]  39.37,118.87 270 top
JP340  [1X02]  30.48,120.14 270 bottom
JP341  FIDUCIAL1X2  [FIDUCIAL-1X2]  14.99,113.79 0 top
JP342  FIDUCIAL1X2  [FIDUCIAL-1X2]  41.15,124.21 0 top
JP343  LOGO-SFESK  [SFE-LOGO-FLAME]  56.26,117.35 0 bottom
JP344  STAND-OFF  [STAND-OFF]  63.5,118.87 0 top
JP345  LiPo Battery  [JST-2-SMD]  76.2,118.87 270 top
JP346  [1X02]  67.31,120.14 270 bottom
JP347  FIDUCIAL1X2  [FIDUCIAL-1X2]  51.82,113.79 0 top
JP348  FIDUCIAL1X2  [FIDUCIAL-1X2]  77.98,124.21 0 top
JP349  LOGO-SFESK  [SFE-LOGO-FLAME]  93.09,117.35 0 bottom
JP350  STAND-OFF  [STAND-OFF]  100.33,118.87 0 top
JP351  LiPo Battery  [JST-2-SMD]  113.03,118.87 270 top
JP352  [1X02]  104.14,120.14 270 bottom
JP353  FIDUCIAL1X2  [FIDUCIAL-1X2]  88.65,113.79 0 top
JP354  FIDUCIAL1X2  [FIDUCIAL-1X2]  114.81,124.21 0 top
JP355  LOGO-SFESK  [SFE-LOGO-FLAME]  129.92,117.35 0 bottom
JP356  STAND-OFF  [STAND-OFF]  137.16,118.87 0 top
JP357  LiPo Battery  [JST-2-SMD]  149.86,118.87 270 top
JP358  [1X02]  140.97,120.14 270 bottom
JP359  FIDUCIAL1X2  [FIDUCIAL-1X2]  125.48,113.79 0 top
JP360  FIDUCIAL1X2  [FIDUCIAL-1X2]  151.64,124.21 0 top
JP361  LOGO-SFESK  [SFE-LOGO-FLAME]  166.75,117.35 0 bottom
JP362  STAND-OFF  [STAND-OFF]  173.99,118.87 0 top
JP363  LiPo Battery  [JST-2-SMD]  186.69,118.87 270 top
JP364  [1X02]  177.8,120.14 270 bottom
JP365  FIDUCIAL1X2  [FIDUCIAL-1X2]  162.31,113.79 0 top
JP366  FIDUCIAL1X2  [FIDUCIAL-1X2]  188.47,124.21 0 top
JP367  LOGO-SFESK  [SFE-LOGO-FLAME]  203.58,117.35 0 bottom
JP368  STAND-OFF  [STAND-OFF]  210.82,118.87 0 top
JP369  LiPo Battery  [JST-2-SMD]  223.52,118.87 270 top
JP370  [1X02]  214.63,120.14 270 bottom
JP371  FIDUCIAL1X2  [FIDUCIAL-1X2]  199.14,113.79 0 top
JP372  FIDUCIAL1X2  [FIDUCIAL-1X2]  225.3,124.21 0 top
JP373  LOGO-SFESK  [SFE-LOGO-FLAME]  240.41,117.35 0 bottom
JP374  STAND-OFF  [STAND-OFF]  247.65,118.87 0 top
JP375  LiPo Battery  [JST-2-SMD]  260.35,118.87 270 top
JP376  [1X02]  251.46,120.14 270 bottom
JP377  FIDUCIAL1X2  [FIDUCIAL-1X2]  235.97,113.79 0 top
JP378  FIDUCIAL1X2  [FIDUCIAL-1X2]  262.13,124.21 0 top
JP379  LOGO-SFESK  [SFE-LOGO-FLAME]  19.43,130.56 0 bottom
JP380  STAND-OFF  [STAND-OFF]  26.67,132.08 0 top
JP381  LiPo Battery  [JST-2-SMD]  39.37,132.08 270 top
JP382  [1X02]  30.48,133.35 270 bottom
JP383  FIDUCIAL1X2  [FIDUCIAL-1X2]  14.99,127 0 top
JP384  FIDUCIAL1X2  [FIDUCIAL-1X2]  41.15,137.41 0 top
JP385  LOGO-SFESK  [SFE-LOGO-FLAME]  56.26,130.56 0 bottom
JP386  STAND-OFF  [STAND-OFF]  63.5,132.08 0 top
JP387  LiPo Battery  [JST-2-SMD]  76.2,132.08 270 top
JP388  [1X02]  67.31,133.35 270 bottom
JP389  FIDUCIAL1X2  [FIDUCIAL-1X2]  51.82,127 0 top
JP390  FIDUCIAL1X2  [FIDUCIAL-1X2]  77.98,137.41 0 top
JP391  LOGO-SFESK  [SFE-LOGO-FLAME]  93.09,130.56 0 bottom
JP392  STAND-OFF  [STAND-OFF]  100.33,132.08 0 top
JP393  LiPo Battery  [JST-2-SMD]  113.03,132.08 270 top
JP394  [1X02]  104.14,133.35 270 bottom
JP395  FIDUCIAL1X2  [FIDUCIAL-1X2]  88.65,127 0 top
JP396  FIDUCIAL1X2  [FIDUCIAL-1X2]  114.81,137.41 0 top
JP397  LOGO-SFESK  [SFE-LOGO-FLAME]  129.92,130.56 0 bottom
JP398  STAND-OFF  [STAND-OFF]  137.16,132.08 0 top
JP399  LiPo Battery  [JST-2-SMD]  149.86,132.08 270 top
JP400  [1X02]  140.97,133.35 270 bottom
JP401  FIDUCIAL1X2  [FIDUCIAL-1X2]  125.48,127 0 top
JP402  FIDUCIAL1X2  [FIDUCIAL-1X2]  151.64,137.41 0 top
JP403  LOGO-SFESK  [SFE-LOGO-FLAME]  166.75,130.56 0 bottom
JP404  STAND-OFF  [STAND-OFF]  173.99,132.08 0 top
JP405  LiPo Battery  [JST-2-SMD]  186.69,132.08 270 top
JP406  [1X02]  177.8,133.35 270 bottom
JP407  FIDUCIAL1X2  [FIDUCIAL-1X2]  162.31,127 0 top
JP408  FIDUCIAL1X2  [FIDUCIAL-1X2]  188.47,137.41 0 top
JP409  LOGO-SFESK  [SFE-LOGO-FLAME]  203.58,130.56 0 bottom
JP410  STAND-OFF  [STAND-OFF]  210.82,132.08 0 top
JP411  LiPo Battery  [JST-2-SMD]  223.52,132.08 270 top
JP412  [1X02]  214.63,133.35 270 bottom
JP413  FIDUCIAL1X2  [FIDUCIAL-1X2]  199.14,127 0 top
JP414  FIDUCIAL1X2  [FIDUCIAL-1X2]  225.3,137.41 0 top
JP415  LOGO-SFESK  [SFE-LOGO-FLAME]  240.41,130.56 0 bottom
JP416  STAND-OFF  [STAND-OFF]  247.65,132.08 0 top
JP417  LiPo Battery  [JST-2-SMD]  260.35,132.08 270 top
JP418  [1X02]  251.46,133.35 270 bottom
JP419  FIDUCIAL1X2  [FIDUCIAL-1X2]  235.97,127 0 top
JP420  FIDUCIAL1X2  [FIDUCIAL-1X2]  262.13,137.41 0 top
R1  330  [0402-RES]  57.15,18.29 180 top
R2  2K  [0402-RES]  58.42,10.67 0 top
R3  330  [0402-RES]  20.32,18.29 180 top
R4  2K  [0402-RES]  21.59,10.67 0 top
R5  330  [0402-RES]  93.98,18.29 180 top
R6  2K  [0402-RES]  95.25,10.67 0 top
R7  330  [0402-RES]  130.81,18.29 180 top
R8  2K  [0402-RES]  132.08,10.67 0 top
R9  330  [0402-RES]  167.64,18.29 180 top
R10  2K  [0402-RES]  168.91,10.67 0 top
R11  330  [0402-RES]  204.47,18.29 180 top
R12  2K  [0402-RES]  205.74,10.67 0 top
R13  330  [0402-RES]  241.3,18.29 180 top
R14  2K  [0402-RES]  242.57,10.67 0 top
R15  330  [0402-RES]  20.32,31.5 180 top
R16  2K  [0402-RES]  21.59,23.88 0 top
R17  330  [0402-RES]  57.15,31.5 180 top
R18  2K  [0402-RES]  58.42,23.88 0 top
R19  330  [0402-RES]  93.98,31.5 180 top
R20  2K  [0402-RES]  95.25,23.88 0 top
R21  330  [0402-RES]  130.81,31.5 180 top
R22  2K  [0402-RES]  132.08,23.88 0 top
R23  330  [0402-RES]  167.64,31.5 180 top
R24  2K  [0402-RES]  168.91,23.88 0 top
R25  330  [0402-RES]  204.47,31.5 180 top
R26  2K  [0402-RES]  205.74,23.88 0 top
R27  330  [0402-RES]  241.3,31.5 180 top
R28  2K  [0402-RES]  242.57,23.88 0 top
R29  330  [0402-RES]  20.32,44.7 180 top
R30  2K  [0402-RES]  21.59,37.08 0 top
R31  330  [0402-RES]  57.15,44.7 180 top
R32  2K  [0402-RES]  58.42,37.08 0 top
R33  330  [0402-RES]  93.98,44.7 180 top
R34  2K  [0402-RES]  95.25,37.08 0 top
R35  330  [0402-RES]  130.81,44.7 180 top
R36  2K  [0402-RES]  132.08,37.08 0 top
R37  330  [0402-RES]  167.64,44.7 180 top
R38  2K  [0402-RES]  168.91,37.08 0 top
R39  330  [0402-RES]  204.47,44.7 180 top
R40  2K  [0402-RES]  205.74,37.08 0 top
R41  330  [0402-RES]  241.3,44.7 180 top
R42  2K  [0402-RES]  242.57,37.08 0 top
R43  330  [0402-RES]  20.32,57.91 180 top
R44  2K  [0402-RES]  21.59,50.29 0 top
R45  330  [0402-RES]  57.15,57.91 180 top
R46  2K  [0402-RES]  58.42,50.29 0 top
R47  330  [0402-RES]  93.98,57.91 180 top
R48  2K  [0402-RES]  95.25,50.29 0 top
R49  330  [0402-RES]  130.81,57.91 180 top
R50  2K  [0402-RES]  132.08,50.29 0 top
R51  330  [0402-RES]  167.64,57.91 180 top
R52  2K  [0402-RES]  168.91,50.29 0 top
R53  330  [0402-RES]  204.47,57.91 180 top
R54  2K  [0402-RES]  205.74,50.29 0 top
R55  330  [0402-RES]  241.3,57.91 180 top
R56  2K  [0402-RES]  242.57,50.29 0 top
R57  330  [0402-RES]  20.32,71.12 180 top
R58  2K  [0402-RES]  21.59,63.5 0 top
R59  330  [0402-RES]  57.15,71.12 180 top
R60  2K  [0402-RES]  58.42,63.5 0 top
R61  330  [0402-RES]  93.98,71.12 180 top
R62  2K  [0402-RES]  95.25,63.5 0 top
R63  330  [0402-RES]  130.81,71.12 180 top
R64  2K  [0402-RES]  132.08,63.5 0 top
R65  330  [0402-RES]  167.64,71.12 180 top
R66  2K  [0402-RES]  168.91,63.5 0 top
R67  330  [0402-RES]  204.47,71.12 180 top
R68  2K  [0402-RES]  205.74,63.5 0 top
R69  330  [0402-RES]  241.3,71.12 180 top
R70  2K  [0402-RES]  242.57,63.5 0 top
R71  330  [0402-RES]  20.32,84.33 180 top
R72  2K  [0402-RES]  21.59,76.71 0 top
R73  330  [0402-RES]  57.15,84.33 180 top
R74  2K  [0402-RES]  58.42,76.71 0 top
R75  330  [0402-RES]  93.98,84.33 180 top
R76  2K  [0402-RES]  95.25,76.71 0 top
R77  330  [0402-RES]  130.81,84.33 180 top
R78  2K  [0402-RES]  132.08,76.71 0 top
R79  330  [0402-RES]  167.64,84.33 180 top
R80  2K  [0402-RES]  168.91,76.71 0 top
R81  330  [0402-RES]  204.47,84.33 180 top
R82  2K  [0402-RES]  205.74,76.71 0 top
R83  330  [0402-RES]  241.3,84.33 180 top
R84  2K  [0402-RES]  242.57,76.71 0 top
R85  330  [0402-RES]  20.32,97.54 180 top
R86  2K  [0402-RES]  21.59,89.92 0 top
R87  330  [0402-RES]  57.15,97.54 180 top
R88  2K  [0402-RES]  58.42,89.92 0 top
R89  330  [0402-RES]  93.98,97.54 180 top
R90  2K  [0402-RES]  95.25,89.92 0 top
R91  330  [0402-RES]  130.81,97.54 180 top
R92  2K  [0402-RES]  132.08,89.92 0 top
R93  330  [0402-RES]  167.64,97.54 180 top
R94  2K  [0402-RES]  168.91,89.92 0 top
R95  330  [0402-RES]  204.47,97.54 180 top
R96  2K  [0402-RES]  205.74,89.92 0 top
R97  330  [0402-RES]  241.3,97.54 180 top
R98  2K  [0402-RES]  242.57,89.92 0 top
R99  330  [0402-RES]  20.32,110.74 180 top
R100  2K  [0402-RES]  21.59,103.12 0 top
R101  330  [0402-RES]  57.15,110.74 180 top
R102  2K  [0402-RES]  58.42,103.12 0 top
R103  330  [0402-RES]  93.98,110.74 180 top
R104  2K  [0402-RES]  95.25,103.12 0 top
R105  330  [0402-RES]  130.81,110.74 180 top
R106  2K  [0402-RES]  132.08,103.12 0 top
R107  330  [0402-RES]  167.64,110.74 180 top
R108  2K  [0402-RES]  168.91,103.12 0 top
R109  330  [0402-RES]  204.47,110.74 180 top
R110  2K  [0402-RES]  205.74,103.12 0 top
R111  330  [0402-RES]  241.3,110.74 180 top
R112  2K  [0402-RES]  242.57,103.12 0 top
R113  330  [0402-RES]  20.32,123.95 180 top
R114  2K  [0402-RES]  21.59,116.33 0 top
R115  330  [0402-RES]  57.15,123.95 180 top
R116  2K  [0402-RES]  58.42,116.33 0 top
R117  330  [0402-RES]  93.98,123.95 180 top
R118  2K  [0402-RES]  95.25,116.33 0 top
R119  330  [0402-RES]  130.81,123.95 180 top
R120  2K  [0402-RES]  132.08,116.33 0 top
R121  330  [0402-RES]  167.64,123.95 180 top
R122  2K  [0402-RES]  168.91,116.33 0 top
R123  330  [0402-RES]  204.47,123.95 180 top
R124  2K  [0402-RES]  205.74,116.33 0 top
R125  330  [0402-RES]  241.3,123.95 180 top
R126  2K  [0402-RES]  242.57,116.33 0 top
R127  330  [0402-RES]  20.32,137.16 180 top
R128  2K  [0402-RES]  21.59,129.54 0 top
R129  330  [0402-RES]  57.15,137.16 180 top
R130  2K  [0402-RES]  58.42,129.54 0 top
R131  330  [0402-RES]  93.98,137.16 180 top
R132  2K  [0402-RES]  95.25,129.54 0 top
R133  330  [0402-RES]  130.81,137.16 180 top
R134  2K  [0402-RES]  132.08,129.54 0 top
R135  330  [0402-RES]  167.64,137.16 180 top
R136  2K  [0402-RES]  168.91,129.54 0 top
R137  330  [0402-RES]  204.47,137.16 180 top
R138  2K  [0402-RES]  205.74,129.54 0 top
R139  330  [0402-RES]  241.3,137.16 180 top
R140  2K  [0402-RES]  242.57,129.54 0 top
U1  MCP73831  [SOT23-5]  21.59,13.21 90 top
U2  MCP73831  [SOT23-5]  58.42,13.21 90 top
U3  MCP73831  [SOT23-5]  95.25,13.21 90 top
U4  MCP73831  [SOT23-5]  132.08,13.21 90 top
U5  MCP73831  [SOT23-5]  168.91,13.21 90 top
U6  MCP73831  [SOT23-5]  205.74,13.21 90 top
U7  MCP73831  [SOT23-5]  242.57,13.21 90 top
U8  MCP73831  [SOT23-5]  21.59,26.42 90 top
U9  MCP73831  [SOT23-5]  58.42,26.42 90 top
U10  MCP73831  [SOT23-5]  95.25,26.42 90 top
U11  MCP73831  [SOT23-5]  132.08,26.42 90 top
U12  MCP73831  [SOT23-5]  168.91,26.42 90 top
U13  MCP73831  [SOT23-5]  205.74,26.42 90 top
U14  MCP73831  [SOT23-5]  242.57,26.42 90 top
U15  MCP73831  [SOT23-5]  21.59,39.62 90 top
U16  MCP73831  [SOT23-5]  58.42,39.62 90 top
U17  MCP73831  [SOT23-5]  95.25,39.62 90 top
U18  MCP73831  [SOT23-5]  132.08,39.62 90 top
U19  MCP73831  [SOT23-5]  168.91,39.62 90 top
U20  MCP73831  [SOT23-5]  205.74,39.62 90 top
U21  MCP73831  [SOT23-5]  242.57,39.62 90 top
U22  MCP73831  [SOT23-5]  21.59,52.83 90 top
U23  MCP73831  [SOT23-5]  58.42,52.83 90 top
U24  MCP73831  [SOT23-5]  95.25,52.83 90 top
U25  MCP73831  [SOT23-5]  132.08,52.83 90 top
U26  MCP73831  [SOT23-5]  168.91,52.83 90 top
U27  MCP73831  [SOT23-5]  205.74,52.83 90 top
U28  MCP73831  [SOT23-5]  242.57,52.83 90 top
U29  MCP73831  [SOT23-5]  21.59,66.04 90 top
U30  MCP73831  [SOT23-5]  58.42,66.04 90 top
U31  MCP73831  [SOT23-5]  95.25,66.04 90 top
U32  MCP73831  [SOT23-5]  132.08,66.04 90 top
U33  MCP73831  [SOT23-5]  168.91,66.04 90 top
U34  MCP73831  [SOT23-5]  205.74,66.04 90 top
U35  MCP73831  [SOT23-5]  242.57,66.04 90 top
U36  MCP73831  [SOT23-5]  21.59,79.25 90 top
U37  MCP73831  [SOT23-5]  58.42,79.25 90 top
U38  MCP73831  [SOT23-5]  95.25,79.25 90 top
U39  MCP73831  [SOT23-5]  132.08,79.25 90 top
U40  MCP73831  [SOT23-5]  168.91,79.25 90 top
U41  MCP73831  [SOT23-5]  205.74,79.25 90 top
U42  MCP73831  [SOT23-5]  242.57,79.25 90 top
U43  MCP73831  [SOT23-5]  21.59,92.46 90 top
U44  MCP73831  [SOT23-5]  58.42,92.46 90 top
U45  MCP73831  [SOT23-5]  95.25,92.46 90 top
U46  MCP73831  [SOT23-5]  132.08,92.46 90 top
U47  MCP73831  [SOT23-5]  168.91,92.46 90 top
U48  MCP73831  [SOT23-5]  205.74,92.46 90 top
U49  MCP73831  [SOT23-5]  242.57,92.46 90 top
U50  MCP73831  [SOT23-5]  21.59,105.66 90 top
U51  MCP73831  [SOT23-5]  58.42,105.66 90 top
U52  MCP73831  [SOT23-5]  95.25,105.66 90 top
U53  MCP73831  [SOT23-5]  132.08,105.66 90 top
U54  MCP73831  [SOT23-5]  168.91,105.66 90 top
U55  MCP73831  [SOT23-5]  205.74,105.66 90 top
U56  MCP73831  [SOT23-5]  242.57,105.66 90 top
U57  MCP73831  [SOT23-5]  21.59,118.87 90 top
U58  MCP73831  [SOT23-5]  58.42,118.87 90 top
U59  MCP73831  [SOT23-5]  95.25,118.87 90 top
U60  MCP73831  [SOT23-5]  132.08,118.87 90 top
U61  MCP73831  [SOT23-5]  168.91,118.87 90 top
U62  MCP73831  [SOT23-5]  205.74,118.87 90 top
U63  MCP73831  [SOT23-5]  242.57,118.87 90 top
U64  MCP73831  [SOT23-5]  21.59,132.08 90 top
U65  MCP73831  [SOT23-5]  58.42,132.08 90 top
U66  MCP73831  [SOT23-5]  95.25,132.08 90 top
U67  MCP73831  [SOT23-5]  132.08,132.08 90 top
U68  MCP73831  [SOT23-5]  168.91,132.08 90 top
U69  MCP73831  [SOT23-5]  205.74,132.08 90 top
U70  MCP73831  [SOT23-5]  242.57,132.08 90 top
X1  Micro USB  [USB-MINIB]  15.24,13.21 0 top
X2  Micro USB  [USB-MINIB]  52.07,13.21 0 top
X3  Micro USB  [USB-MINIB]  88.9,13.21 0 top
X4  Micro USB  [USB-MINIB]  125.73,13.21 0 top
X5  Micro USB  [USB-MINIB]  162.56,13.21 0 top
X6  Micro USB  [USB-MINIB]  199.39,13.21 0 top
X7  Micro USB  [USB-MINIB]  236.22,13.21 0 top
X8  Micro USB  [USB-MINIB]  15.24,26.42 0 top
X9  Micro USB  [USB-MINIB]  52.07,26.42 0 top
X10  Micro USB  [USB-MINIB]  88.9,26.42 0 top
X11  Micro USB  [USB-MINIB]  125.73,26.42 0 top
X12  Micro USB  [USB-MINIB]  162.56,26.42 0 top
X13  Micro USB  [USB-MINIB]  199.39,26.42 0 top
X14  Micro USB  [USB-MINIB]  236.22,26.42 0 top
X15  Micro USB  [USB-MINIB]  15.24,39.62 0 top
X16  Micro USB  [USB-MINIB]  52.07,39.62 0 top
X17  Micro USB  [USB-MINIB]  88.9,39.62 0 top
X18  Micro USB  [USB-MINIB]  125.73,39.62 0 top
X19  Micro USB  [USB-MINIB]  162.56,39.62 0 top
X20  Micro USB  [USB-MINIB]  199.39,39.62 0 top
X21  Micro USB  [USB-MINIB]  236.22,39.62 0 top
X22  Micro USB  [USB-MINIB]  15.24,52.83 0 top
X23  Micro USB  [USB-MINIB]  52.07,52.83 0 top
X24  Micro USB  [USB-MINIB]  88.9,52.83 0 top
X25  Micro USB  [USB-MINIB]  125.73,52.83 0 top
X26  Micro USB  [USB-MINIB]  162.56,52.83 0 top
X27  Micro USB  [USB-MINIB]  199.39,52.83 0 top
X28  Micro USB  [USB-MINIB]  236.22,52.83 0 top
X29  Micro USB  [USB-MINIB]  15.24,66.04 0 top
X30  Micro USB  [USB-MINIB]  52.07,66.04 0 top
X31  Micro USB  [USB-MINIB]  88.9,66.04 0 top
X32  Micro USB  [USB-MINIB]  125.73,66.04 0 top
X33  Micro USB  [USB-MINIB]  162.56,66.04 0 top
X34  Micro USB  [USB-MINIB]  199.39,66.04 0 top
X35  Micro USB  [USB-MINIB]  236.22,66.04 0 top
X36  Micro USB  [USB-MINIB]  15.24,79.25 0 top
X37  Micro USB  [USB-MINIB]  52.07,79.25 0 top
X38  Micro USB  [USB-MINIB]  88.9,79.25 0 top
X39  Micro USB  [USB-MINIB]  125.73,79.25 0 top
X40  Micro USB  [USB-MINIB]  162.56,79.25 0 top
X41  Micro USB  [USB-MINIB]  199.39,79.25 0 top
X42  Micro USB  [USB-MINIB]  236.22,79.25 0 top
X43  Micro USB  [USB-MINIB]  15.24,92.46 0 top
X44  Micro USB  [USB-MINIB]  52.07,92.46 0 top
X45  Micro USB  [USB-MINIB]  88.9,92.46 0 top
X46  Micro USB  [USB-MINIB]  125.73,92.46 0 top
X47  Micro USB  [USB-MINIB]  162.56,92.46 0 top
X48  Micro USB  [USB-MINIB]  199.39,92.46 0 top
X49  Micro USB  [USB-MINIB]  236.22,92.46 0 top
X50  Micro USB  [USB-MINIB]  15.24,105.66 0 top
X51  Micro USB  [USB-MINIB]  52.07,105.66 0 top
X52  Micro USB  [USB-MINIB]  88.9,105.66 0 top
X53  Micro USB  [USB-MINIB]  125.73,105.66 0 top
X54  Micro USB  [USB-MINIB]  162.56,105.66 0 top
X55  Micro USB  [USB-MINIB]  199.39,105.66 0 top
X56  Micro USB  [USB-MINIB]  236.22,105.66 0 top
X57  Micro USB  [USB-MINIB]  15.24,118.87 0 top
X58  Micro USB  [USB-MINIB]  52.07,118.87 0 top
X59  Micro USB  [USB-MINIB]  88.9,118.87 0 top
X60  Micro USB  [USB-MINIB]  125.73,118.87 0 top
X61  Micro USB  [USB-MINIB]  162.56,118.87 0 top
X62  Micro USB  [USB-MINIB]  199.39,118.87 0 top
X63  Micro USB  [USB-MINIB]  236.22,118.87 0 top
X64  Micro USB  [USB-MINIB]  15.24,132.08 0 top
X65  Micro USB  [USB-MINIB]  52.07,132.08 0 top
X66  Micro USB  [USB-MINIB]  88.9,132.08 0 top
X67  Micro USB  [USB-MINIB]  125.73,132.08 0 top
X68  Micro USB  [USB-MINIB]  162.56,132.08 0 top
X69  Micro USB  [USB-MINIB]  199.39,132.08 0 top
X70  Micro USB  [USB-MINIB]  236.22,132.08 0 top

## Library data of the parts
C1-C140 D1-D70 JP1-JP420 R1-R140 U1-U70 X1-X70 = SparkFun
E$1 = SparkFun-Retired
E$4 E$5 = SparkFun-Aesthetics